# EAGLE board V0_24 (EAGLE 8.5.2)
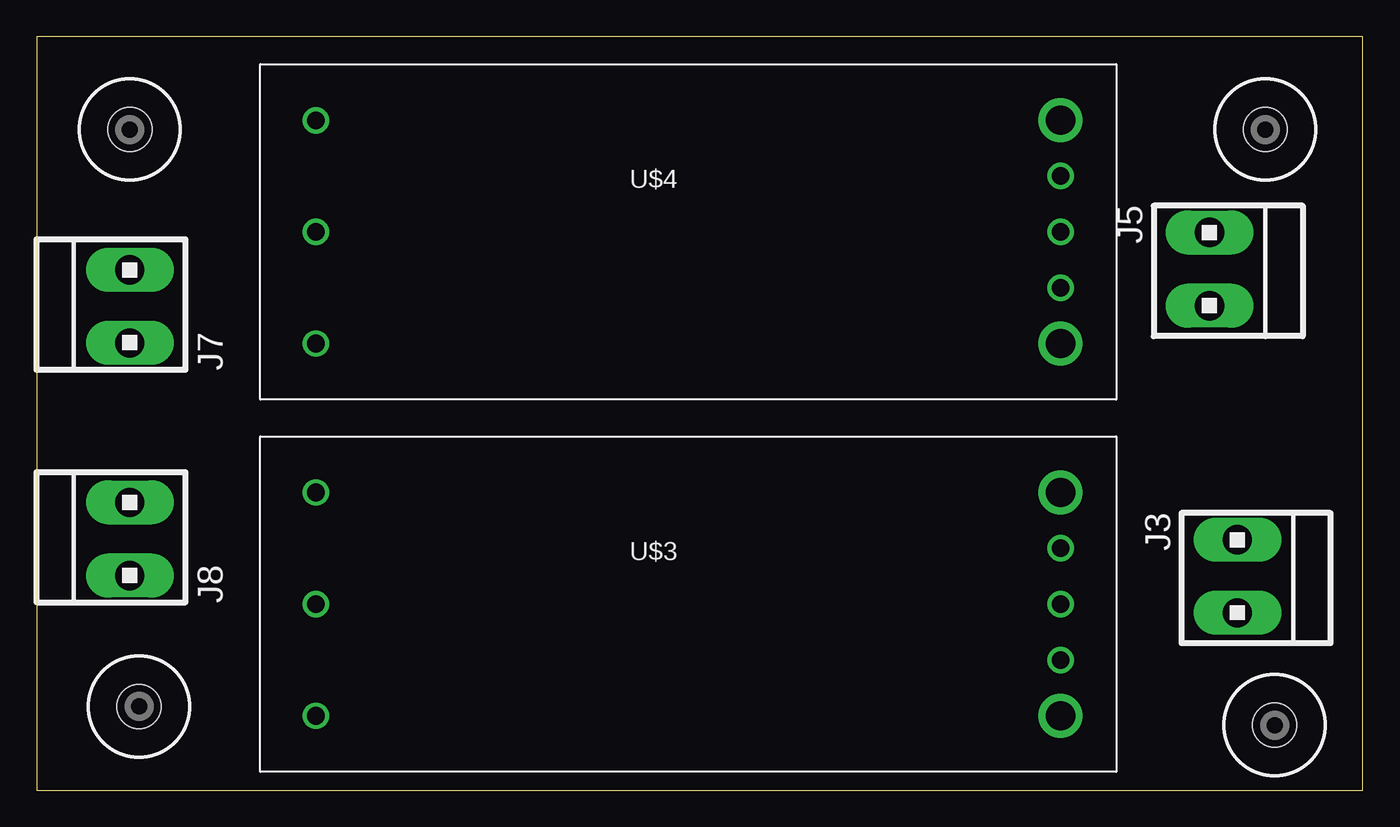
[diagram p0: board, top side]
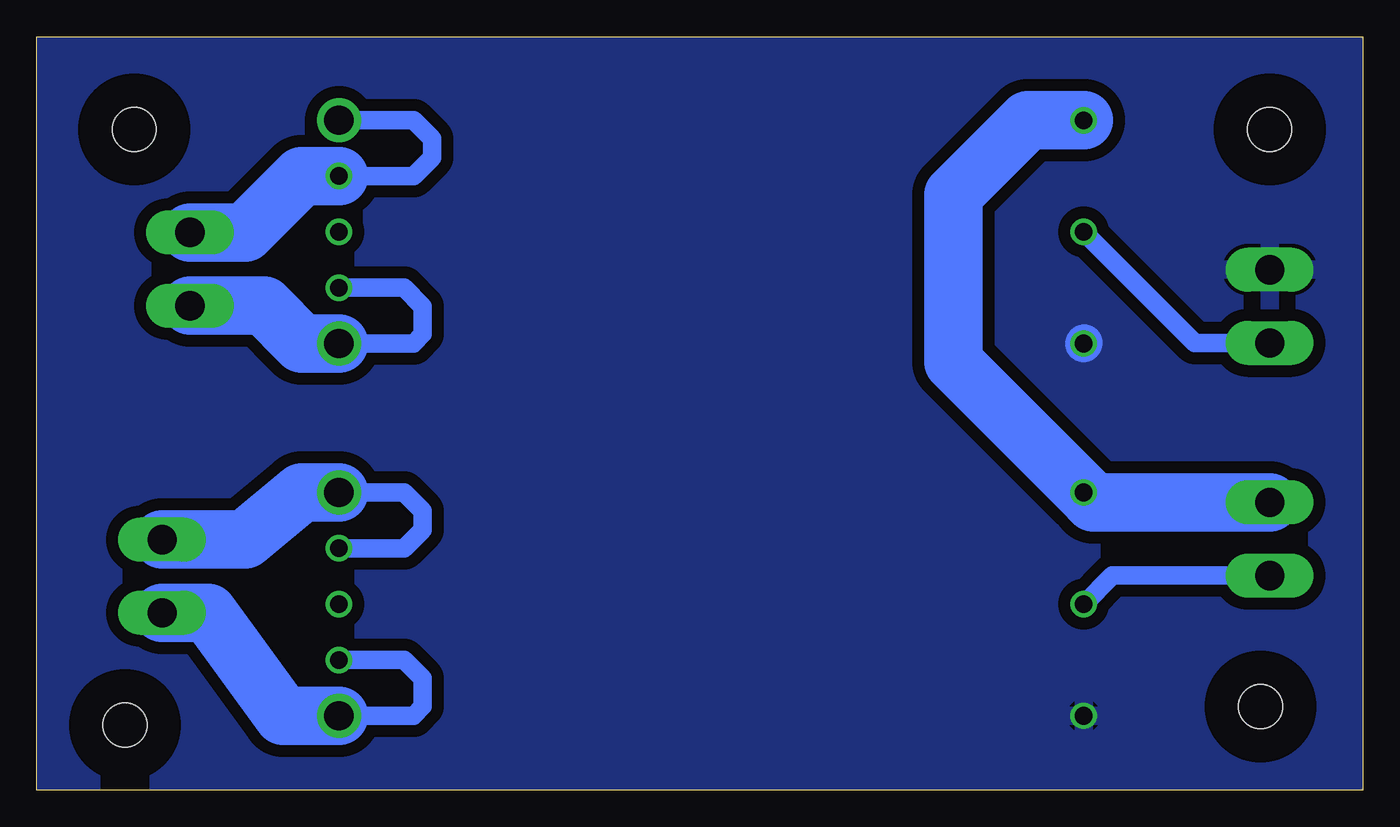
[diagram p1: board, bottom side, seen from below]

Size 90.47 x 51.42 mm. Coordinates in mm from the lower left corner, seen from the top.
Outline: 0,0 90.47,0 90.47,51.42 0,51.42 0,0
Copper layers (1*16): Top 0.035mm / dielectric 1.5mm / Bottom 0.035mm
Design rules "default *": minimum track width 8mil, minimum drill 0.8mm, track to track 32mil, track to pad 32mil, pad to pad 32mil, via to via 32mil, smd to smd 32mil, copper to edge 1mil, drill to drill 6mil, minimum pad ring 10mil, minimum via ring 8mil, stop-mask expansion 4mil, vias tented up to drill 0mil, thermal gap 10mil

## Footprints (pad centres in the part's own frame; a part is rotated, then mirrored left to right if it is on the bottom)
MYJUMPER = drill 2 long: 1 2.5,0; 2 -2.5,0
DRIL-3 = hole 3: 0,0
UWE = drill 1.2: +SENSE 25.4,-3.81; +VIN -25.4,-7.62; -SENSE 25.4,3.81; -VIN -25.4,7.62; ON/OFF-CONTROL -25.4,0; TRIM 25.4,0 | drill 2: +VOUT 25.4,-7.62; -VOUT 25.4,7.62

## Placement (x,y rotation side)
J3  [MYJUMPER]  81.92,14.61 270 top
J5  [MYJUMPER]  80.01,35.56 270 top
J7  [MYJUMPER]  6.35,33.02 90 top
J8  [MYJUMPER]  6.35,17.14 90 top
U$1  [DRIL-3]  83.82,45.09 0 top
U$2  [DRIL-3]  84.45,4.45 0 top
U$3  DC/DC_CONV_24V  [UWE]  44.45,12.7 0 top
U$4  DC/DC_CONV_24V  [UWE]  44.45,38.1 0 top
U$5  [DRIL-3]  6.99,5.71 0 top
U$6  [DRIL-3]  6.35,45.09 0 top

## Library data of the parts
J3 J5 J7 J8 = 1x2mta
U$1 U$2 U$5 U$6 = special
U$3 U$4 = launch-tower

## Nets
GND: J7.1 U$3.+VIN U$4.+VIN
N$8: J5.1 U$4.+SENSE U$4.+VOUT
N$9: J5.2 U$4.-SENSE U$4.-VOUT
N$13: J3.1 U$3.+SENSE U$3.+VOUT
N$14: J3.2 U$3.-SENSE U$3.-VOUT
N$16: J8.2 U$3.ON/OFF-CONTROL
S$2: J7.2 U$4.ON/OFF-CONTROL
S$3: J8.1 U$3.-VIN U$4.-VIN

## Tracks (layer width: path | path; a pad name or v marks a point on that pad's centre or on a via)
GND
  Bottom 2.54: U$4.+VIN 19.01,30.52
  pour Bottom: 0,0 90.81,0 90.81,51.44 0,51.44
N$8
  Bottom 1.27: U$4.+SENSE 65.41,34.29 64.14,33.02 64.14,31.11 64.77,30.48 U$4.+VOUT
  Bottom 4: U$4.+VOUT 72.39,30.48 74.97,33.06 J5.1
N$9
  Bottom 1.27: U$4.-VOUT 64.77,45.72 63.5,44.45 63.5,43.18 64.77,41.91 U$4.-SENSE
  Bottom 4: U$4.-SENSE 72.39,41.91 76.24,38.06 J5.2
N$13
  Bottom 1.27: U$3.+SENSE 65.41,8.89 64.14,7.62 64.14,5.71 64.77,5.08 U$3.+VOUT
  Bottom 4: U$3.+VOUT 73.66,5.08 78.78,12.11 J3.1
N$14
  Bottom 1.27: U$3.-VOUT 65.41,20.32 64.14,19.05 64.14,17.78 65.41,16.51 U$3.-SENSE
  Bottom 4: J3.2 76.24,17.11 72.39,20.32 U$3.-VOUT
N$16
  Bottom 1.27: J8.2 17.11,14.64 U$3.ON/OFF-CONTROL
S$2
  Bottom 1.27: U$4.ON/OFF-CONTROL 11.47,30.52 J7.2
S$3
  Bottom 4: J8.1 18.38,19.64 U$3.-VIN 27.94,29.21 27.94,40.64 22.86,45.72 U$4.-VIN